# Altium PCB PCB1.PcbDoc
Units mm, origin at the board's own origin, x right, y up, seen from the top; angles counter-clockwise.
Board outline 71.12 x 64.77 mm, 2 copper layers (Top Layer, Bottom Layer); 12 components, 9 nets, 96 pads, 0 vias.
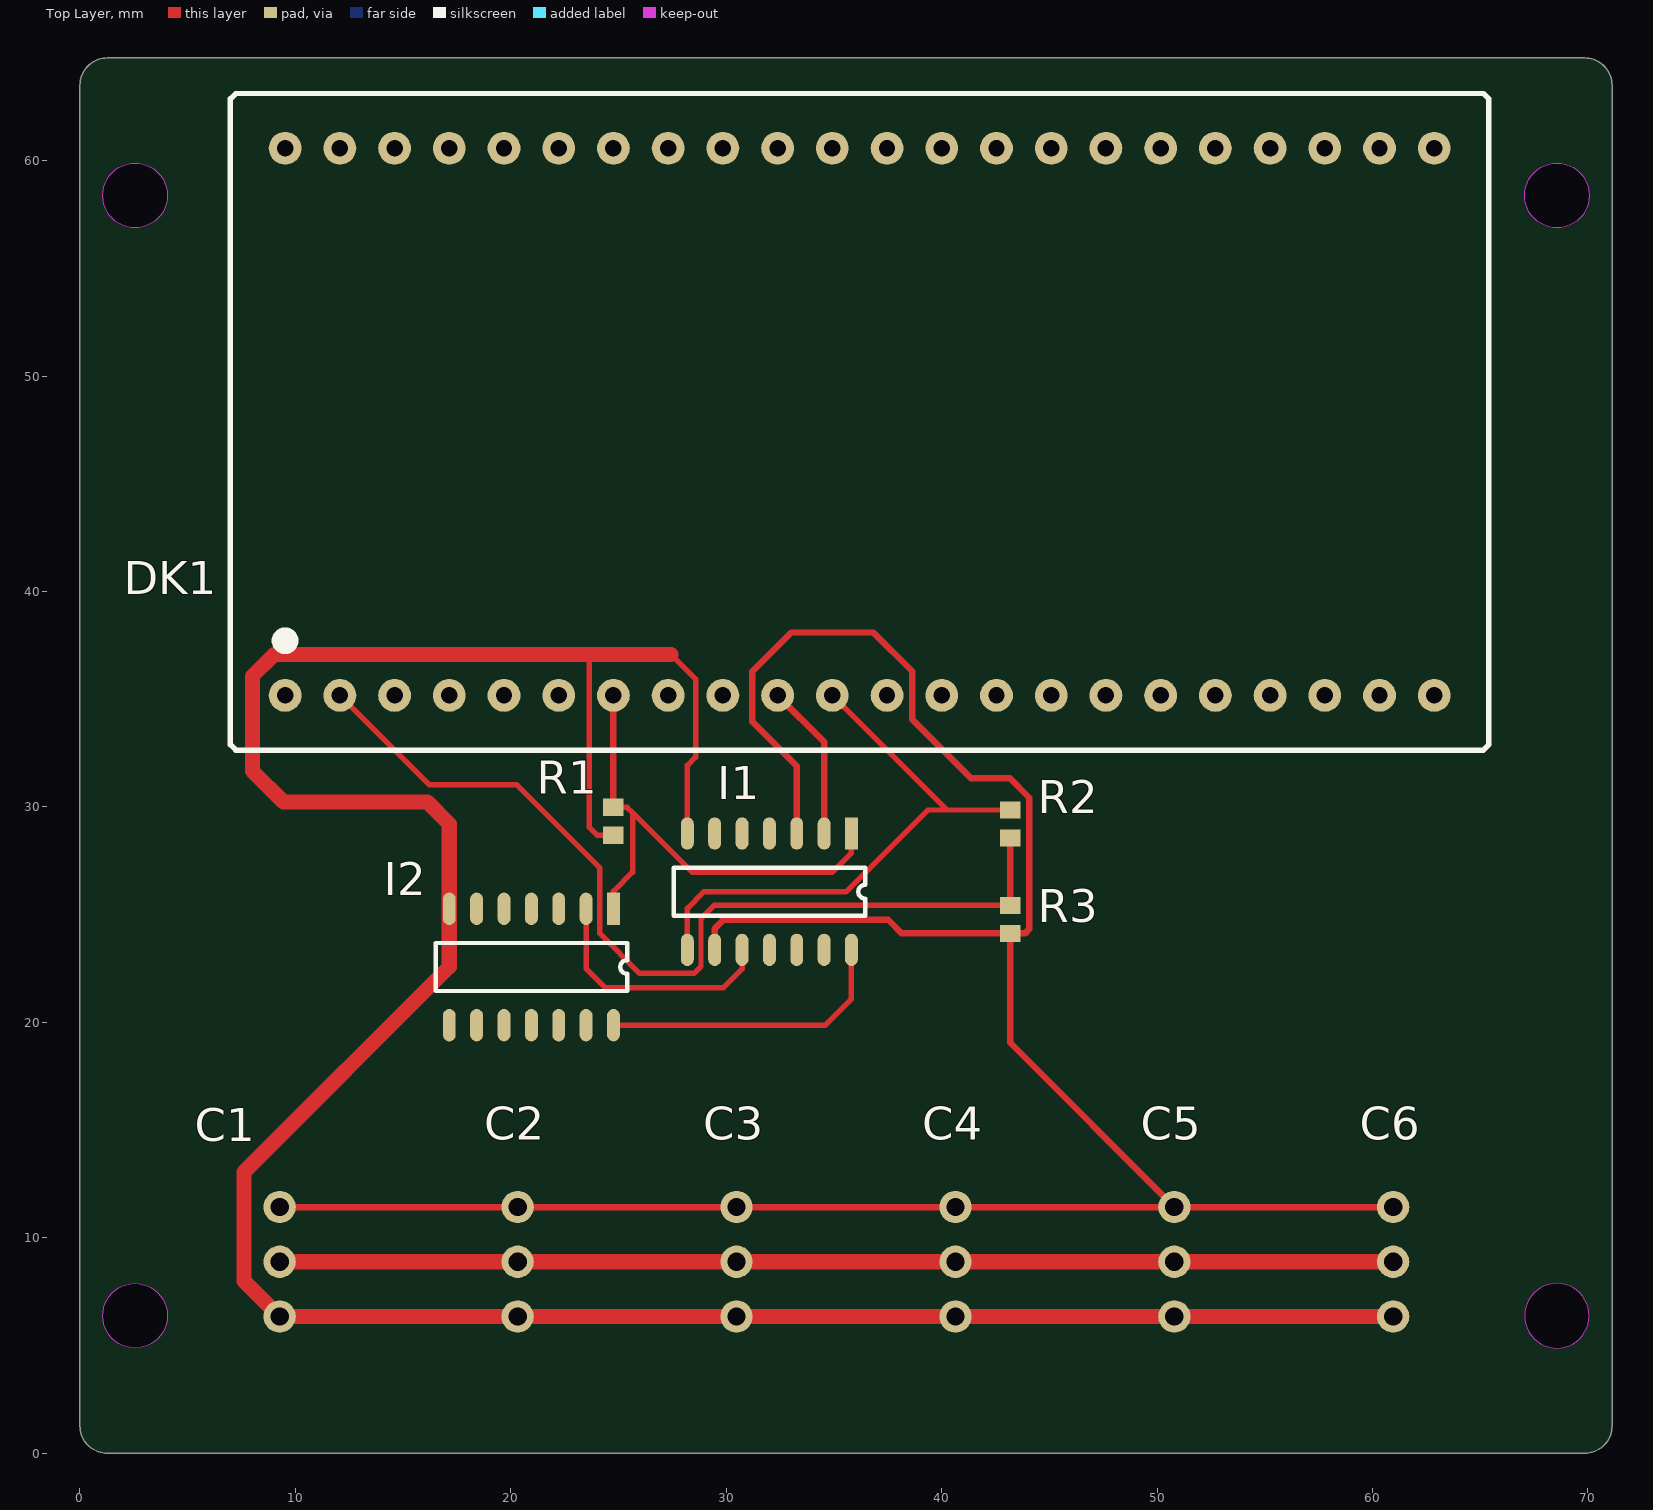
[diagram p0: Top Layer view]
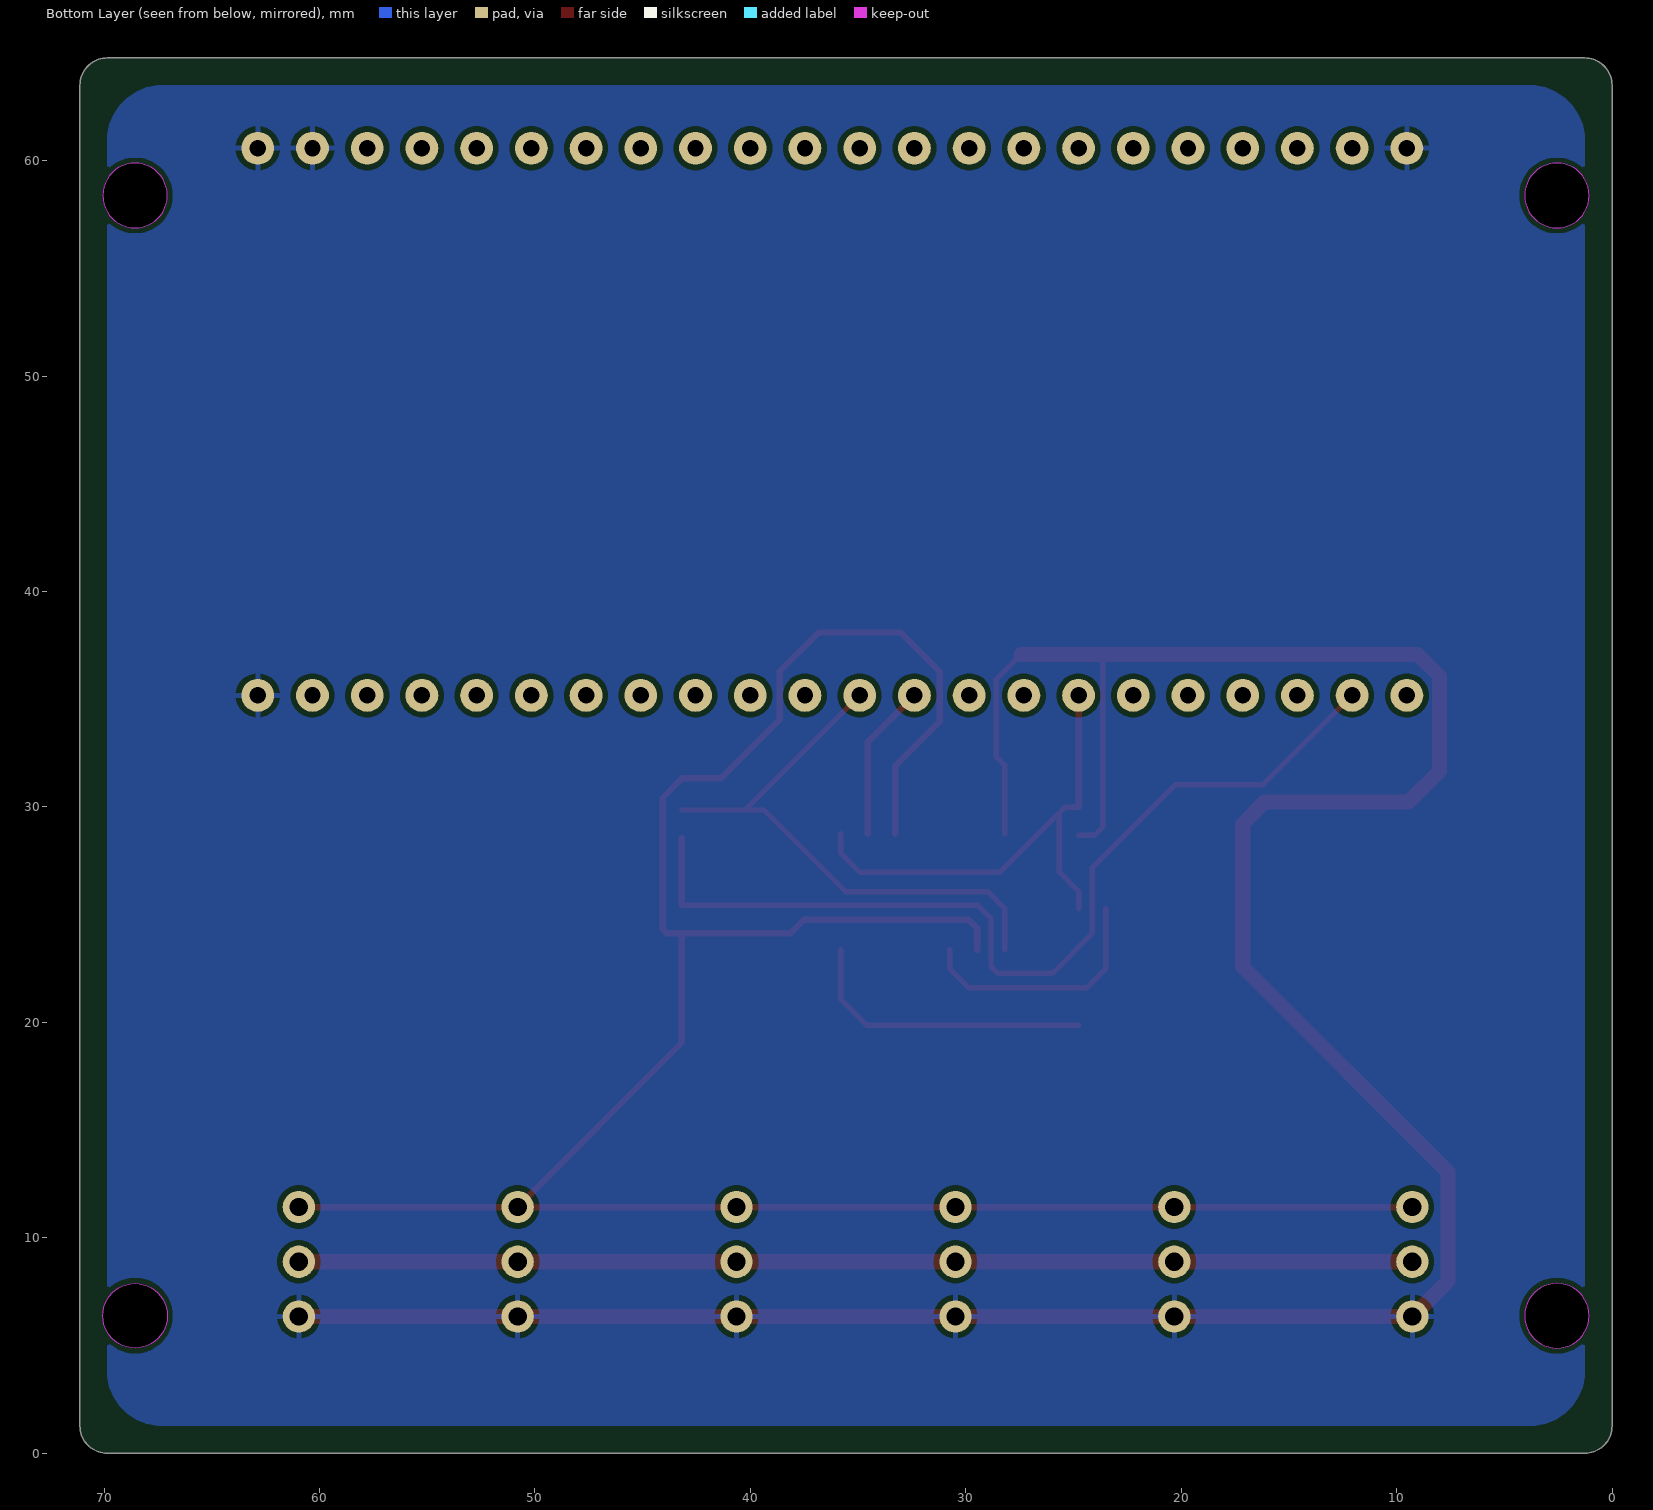
[diagram p1: Bottom Layer view, seen from below]
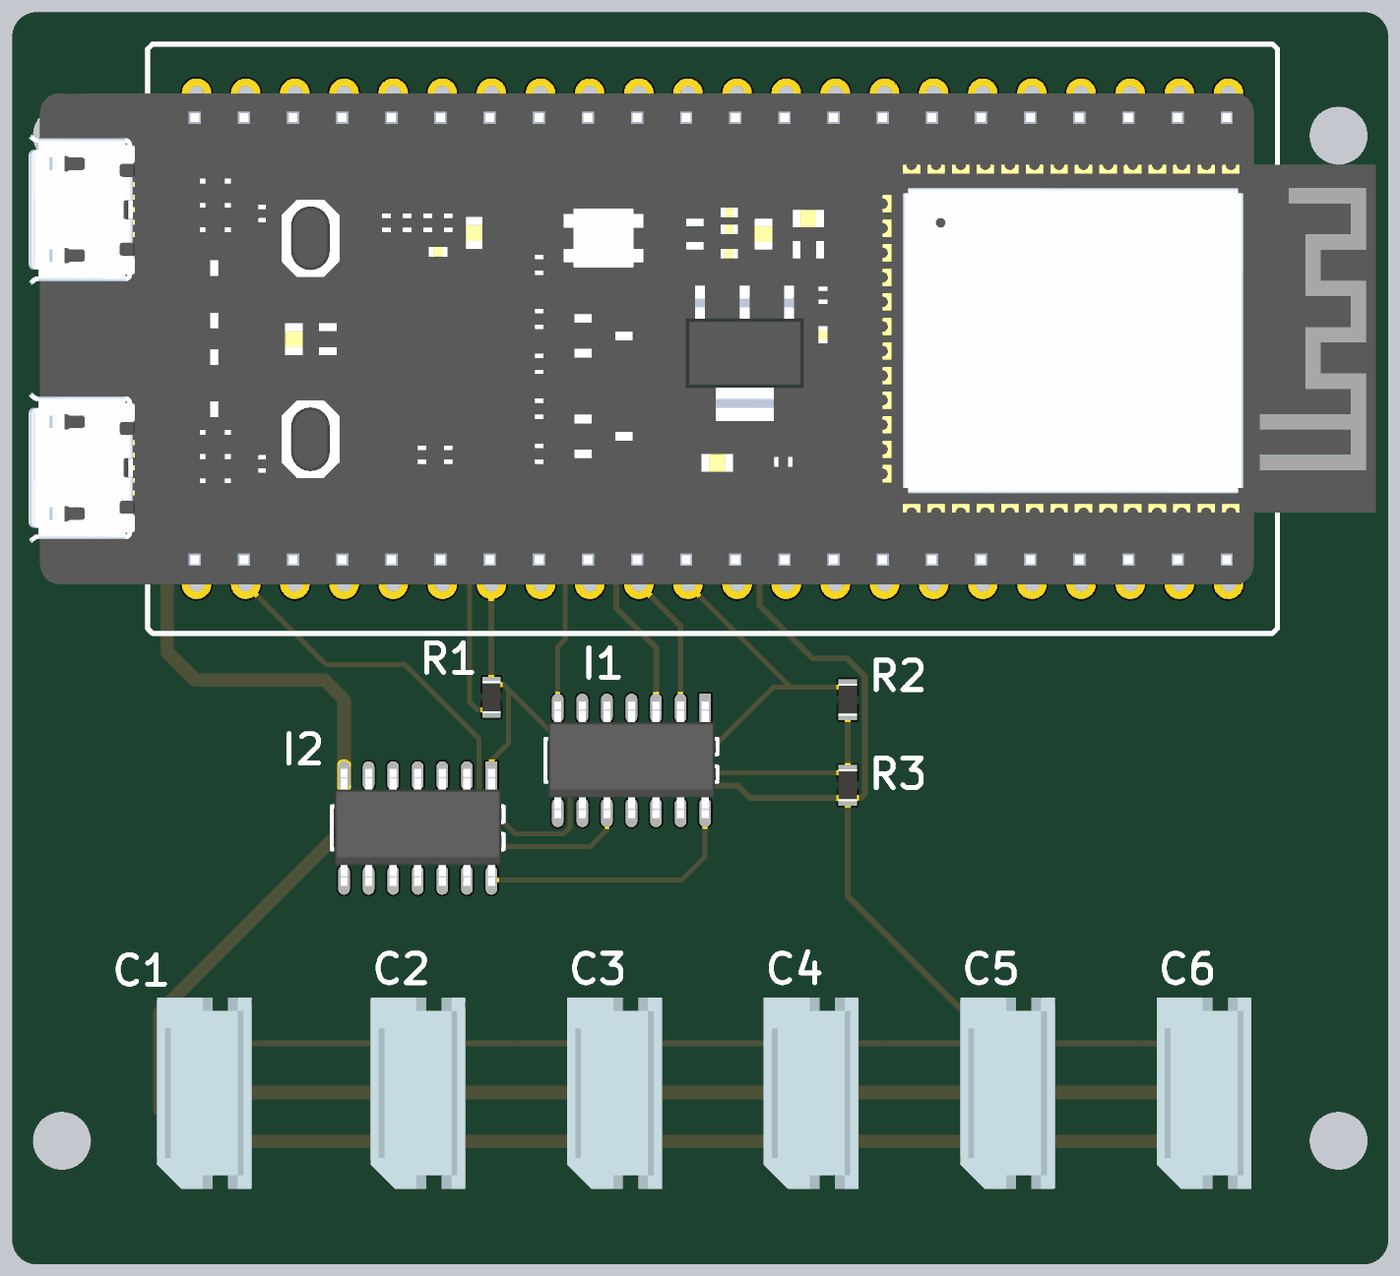
[diagram p2: 3D render of the assembled board from above, using the file's embedded part models]

## Layer stack, top to bottom
Top Solder: solder mask 0.0102, Solder Resist, Dk 3.5
Top Layer: signal copper 0.0356
Dielectric 1: dielectric 0.32, FR-4, Dk 4.8
Bottom Layer: signal copper 0.0356
Bottom Solder: solder mask 0.0102, Solder Resist, Dk 3.5

## Board outline
0,1.27 0,63.5 cw(c1.27,63.5) 1.27,64.77 69.85,64.77 cw(c69.85,63.5) 71.12,63.5 71.12,1.27 cw(c69.85,1.27) 69.85,0 1.27,0 cw(c1.27,1.27)
cut-out: 2.56,4.885 cw(c2.56,6.385) 1.06,6.385 cw(c2.56,6.385) 2.56,7.885 cw(c2.56,6.385) 4.06,6.385 cw(c2.56,6.385)
cut-out: 67.06,6.385 ccw(c68.56,6.385) 68.56,4.885 ccw(c68.56,6.385) 70.06,6.385 ccw(c68.56,6.385) 68.56,7.885 ccw(c68.56,6.385)
cut-out: 68.56,56.885 cw(c68.56,58.385) 67.06,58.385 cw(c68.56,58.385) 68.56,59.885 cw(c68.56,58.385) 70.06,58.385 cw(c68.56,58.385)
cut-out: 2.56,56.885 cw(c2.56,58.385) 1.06,58.385 cw(c2.56,58.385) 2.56,59.885 cw(c2.56,58.385) 4.06,58.385 cw(c2.56,58.385)

## Design rules (kind name [scope] priority, off if disabled: settings)
BoardOutlineClearance BoardOutlineClearance_2 [All] p1: gap=0.254 ignorepadtopadclearanceinfootprint=FALSE except(0: Arc-SplitContinuation Track-SplitContinuation SMDPad-SplitContinuation THPad-SplitContinuation Via-SplitContinuation Fill-SplitContinuation Poly-SplitContinuation Region-SplitContinuation Text-SplitContinuation)
BoardOutlineClearance BoardOutlineClearance_1 [All] p2: gap=0.254 ignorepadtopadclearanceinfootprint=FALSE except(0: Arc-SplitContinuation Track-SplitContinuation SMDPad-SplitContinuation THPad-SplitContinuation Via-SplitContinuation Fill-SplitContinuation Poly-SplitContinuation Region-SplitContinuation Text-SplitContinuation)
Clearance Clearance_1 [OnMid vs OnMid] p1: gap=0.25 ignorepadtopadclearanceinfootprint=FALSE except(0.2: Arc-Arc Arc-Track Arc-SMDPad Arc-THPad Arc-Text Track-Track Track-SMDPad Track-THPad Track-Text SMDPad-SMDPad SMDPad-THPad SMDPad-Via SMDPad-Text THPad-THPad THPad-Via THPad-Text Via-Via Text-Text Hole-Hole; 0.254: Arc-Via Track-Via Via-Text; 0.5: Arc-Hole Track-Hole SMDPad-Hole THPad-Hole Via-Hole Fill-Hole Poly-Hole Region-Hole Text-Hole) sourcerule=39 cellrowname=All cellrowtype=0 cellcolname=All cellcoltype=0 innerlayers=TRUE
Clearance Clearance_2 [(ExistsOnLayer('Top Layer') Or ExistsOnLayer('Bottom Layer')) vs (ExistsOnLayer('Top Layer') Or ExistsOnLayer('Bottom Layer'))] p2: gap=0.25 ignorepadtopadclearanceinfootprint=FALSE except(0.2: Arc-Arc Arc-Track Arc-SMDPad Arc-THPad Arc-Text Track-Track Track-SMDPad Track-THPad Track-Text SMDPad-SMDPad SMDPad-THPad SMDPad-Via SMDPad-Text THPad-THPad THPad-Via THPad-Text Via-Via Text-Text Hole-Hole; 0.254: Arc-Via Track-Via Via-Text; 0.5: Arc-Hole Track-Hole SMDPad-Hole THPad-Hole Via-Hole Fill-Hole Poly-Hole Region-Hole Text-Hole) sourcerule=39 cellrowname=All cellrowtype=0 cellcolname=All cellcoltype=0 outerlayers=TRUE
Clearance [All] p3: gap=0.254 ignorepadtopadclearanceinfootprint=FALSE ismatrix=TRUE
PlaneConnect [All] p1: planeconnectstyle=Direct reliefexpansion=0.508 reliefentries=4 reliefconductorwidth=0.254 reliefairgap=0.254
PolygonConnect [All] p1: connectstyle=Relief reliefconductorwidth=0.254 reliefentries=4 polygonreliefangle="90 Angle" airgapwidth=0.254
RoutingVias [All] p1: holewidth=0.711 width=1.27 viastyle="Through Hole" minholewidth=0.711 minwidth=1.27 maxholewidth=0.711 maxwidth=1.27
SolderMaskExpansion [All] p1: expansion=0.102 istentingtop=FALSE
UnRoutedNet UnRoutedNet_1 [InNet('GND')] p1: checkbadconnections=TRUE
UnRoutedNet [All] p2:
Width [All] p1: maxlimit=1 minlimit=0.102 preferedwidth=0.3
28 further rules are at their usual default settings.

## Classes and differential pairs
component class Sheet: C1 DK1 I2 R1

## Components (designator, comment, footprint, x,y, rotation, side; value= is the part's Value field where it differs from the comment)
C1 "MOLEX 22-03-5035" PCBComponent_1 9.271,6.35 r90 top (schematic designator C?)
C2 "MOLEX 22-03-5035" PCBComponent_1 20.32,6.35 r90 top (schematic designator C?)
C3 "MOLEX 22-03-5035" PCBComponent_1 30.48,6.35 r90 top (schematic designator C?)
C4 "MOLEX 22-03-5035" PCBComponent_1 40.64,6.35 r90 top (schematic designator C?)
C5 "MOLEX 22-03-5035" PCBComponent_1 50.8,6.35 r90 top (schematic designator C?)
C6 "MOLEX 22-03-5035" PCBComponent_1 60.96,6.35 r90 top (schematic designator C?)
DK1 "ESP32-S3" "ESP32-S3-DevKit footprint" 34.925,47.879 r90 top (schematic designator DK?)
I1 "74LVC125A" SOP14 35.814,28.768 r270 top (schematic designator I?)
I2 "74LVC14AD" SOP14 24.765,25.273 r270 top (schematic designator I?)
R1 "10k" RESC1609X50X30NL8T20 24.765,29.337 r270 top (schematic designator R?)
R2 "10k" RESC1609X50X30NL8T20 43.18,29.21 r270 top (schematic designator R?)
R3 "10k" RESC1609X50X30NL8T20 43.18,24.78 r270 top (schematic designator R?)

## Footprints (in the part's own frame and the unit in brackets; to place one, negate y for a bottom-side part, rotate by r counter-clockwise, add the part's x,y. Pads: shape width x height; smd on the part's side, far side on the other; paste and mask are expansions set on the pad)
"ESP32-S3-DevKit footprint" [mil]
  round 60 hole 30: 1(-500,1000) 2(-500,900) 3(-500,800) 4(-500,700) 5(-500,600) 6(-500,500) 7(-500,400) 8(-500,300) 9(-500,200) 10(-500,100) 11(-500,0) 12(-500,-100) 13(-500,-200) 14(-500,-300) 15(-500,-400) 16(-500,-500) 17(-500,-600) 18(-500,-700) 19(-500,-800) 20(-500,-900) 21(-500,-1000) 22(-500,-1100) 23(500,-1100) 24(500,-1000) 25(500,-900) 26(500,-800) 27(500,-700) 28(500,-600) 29(500,-500) 30(500,-400) 31(500,-300) 32(500,-200) 33(500,-100) 34(500,0) 35(500,100) 36(500,200) 37(500,300) 38(500,400) 39(500,500) 40(500,600) 41(500,700) 42(500,800) 43(500,900) 44(500,1000)
  silkscreen extent -600,-1200 600,1100, body extent -500,-1400 500,1342, height 361
PCBComponent_1 [mm]
  round 1.5 hole 0.85: 1(0,0) 2(2.54,0) 3(5.08,0)
  body extent -2.45,-3.1 7.45,1.8, height 5.8
RESC1609X50X30NL8T20 [mm] "Chip Resistor, 2-Leads, Body 1.65x0.95mm, IPC Medium Density"
  rect 0.8x0.95 smd: 1(-0.65,0) 2(0.65,0)
  body extent -0.82,-0.48 0.82,0.48, height 0.5
SOP14 [mm]
  rect 1.5x0.6 smd: 1(0,0)
  oval 1.5x0.6 smd: 2(0,-1.27) 3(0,-2.54) 4(0,-3.81) 5(0,-5.08) 6(0,-6.35) 7(0,-7.62) 8(5.4,0) 9(5.4,-1.27) 10(5.4,-2.54) 11(5.4,-3.81) 12(5.4,-5.08) 13(5.4,-6.35) 14(5.4,-7.62)
  silkscreen extent 1.59,-8.25 3.81,0.64, body extent -0.36,-8.13 5.69,0.51, height 1.64

## Part data
DK1: library part "ESP32-S3-N16R2 DevKit"
R1 R2 R3: library part CMP-1666-00005-4, "Chip Resistor, 10 KOhm, +/- 1%, 100 mW, -55 to 155 degC, 0603 (1608 Metric), RoHS, Tape and Reel", Manufacturer="Vishay Semiconductor", Max Operating Temperature="155 degC", Min Operating Temperature="-55 degC", Package Quantity=5000, Voltage Rating="75 V", ComponentLink1Description="Manufacturer URL", ComponentLink1URL=http://www.vishay.com/, ComponentLink2Description=Datasheet, ComponentLink2URL=https://datasheet.ciiva.com/11809/0900766b80d98afc-11809037.pdf, DatasheetVersion=06/2012, Height="0.45 mm", Length="1.55 mm", Mounting Technology="Surface Mount", PackageDescription="2-Pin Surface Mount Device, Body 1.575 x 0.85 mm", PackageReference=0603, Packaging="Tape and Reel", REACH SVHC=Unknown, RoHSCompliant=true

## Nets (pads, with @x,y where several pads share a name; then routed paths per layer and width w, separated by ;. In a path a pad name is that pad's centre, name@x,y a point inside that pad or via, vN(x,y) a via of type N, cw(c..) or ccw(c..) an arc to the next point about the centre after c; other vN are vias at no path point)
3V3: I1.8 I2.8 | length 13.8
  Top Layer w0.254: I2.8 34.605,19.873 35.814,21.082 I1.8
+3V3: DK1.2 R2.2 R3.1 | length 44
  Top Layer w0.254: DK1.2 16.217,31.027 20.281,31.027 24.13,27.178 24.13,24.13 25.984,22.276 28.499,22.276 28.829,22.606 28.829,24.816 29.443,25.43 R3.1
  Top Layer w0.3: R3.1 R2.2
+12: C1.2 C2.2 C3.2 C4.2 C5.2 C6.2 | length 51.7
  Top Layer w0.7: C1.2 C2.2 C3.2 C4.2 C5.2 C6.2
GND: C1.1 C2.1 C3.1 C4.1 C5.1 C6.1 DK1.22 DK1.23 DK1.24 DK1.44 I1.7 I2.7 R1.2 | length 131.8
  Top Layer w0.254: 23.647,37.084 23.647,29.058 24.018,28.687 R1.2 ; 27.432,37.084 28.575,35.941 28.575,32.309 28.194,31.928 I1.7
  Top Layer w0.7: 27.432,37.084 23.647,37.084 9.017,37.084 8.001,36.068 8.001,31.674 9.449,30.226 16.129,30.226 17.145,29.21 I2.7 17.145,22.581 7.62,13.056 7.62,8.001 C1.1 C2.1 C3.1 C4.1 C5.1 C6.1
RX: DK1.11 I1.14 R2.1 | length 26.3
  Top Layer w0.254: I1.14 28.194,25.298 28.956,26.06 35.56,26.06 39.36,29.86 40.244,29.86 ; DK1.11 40.244,29.86 ; R2.1 40.244,29.86
RXEN: I1.12 I2.2 | length 11.6
  Top Layer w0.254: I2.2 23.495,22.504 24.384,21.615 29.87,21.615 30.734,22.479 I1.12
SERVO_DATA: C1.3 C2.3 C3.3 C4.3 C5.3 C6.3 I1.3 I1.13 R3.2 | length 116.2
  Top Layer w0.3: C1.3 C2.3 C3.3 C4.3 C5.3 ; I1.13 29.464,24.359 29.87,24.765 37.516,24.765 38.151,24.13 R3.2 ; I1.3 33.274,31.902 31.217,33.96 31.217,36.297 33.02,38.1 36.83,38.1 38.633,36.297 38.633,34.061 41.351,31.344 43.155,31.344 44.069,30.429 44.069,24.333 43.866,24.13 R3.2 ; C6.3 C5.3 ; R3.2 43.18,19.05 C5.3
TX: DK1.10 I1.2 | length 7.3
  Top Layer w0.3: DK1.10 34.544,33.02 I1.2
TXEN: DK1.7 I1.1 I2.1 R1.1 | length 23.6
  Top Layer w0.254: I2.1 24.765,26.086 25.654,26.975 25.654,29.733 ; R1.1 25.4,29.987 25.654,29.733 ; I1.1 35.814,27.864 34.925,26.975 28.412,26.975 25.654,29.733
  Top Layer w0.3: R1.1 DK1.7
pads on no net: DK1.1 DK1.3 DK1.4 DK1.5 DK1.6 DK1.8 DK1.9 DK1.12 DK1.13 DK1.14 DK1.15 DK1.16 DK1.17 DK1.18 DK1.19 DK1.20 DK1.21 DK1.25 DK1.26 DK1.27 DK1.28 DK1.29 DK1.30 DK1.31 DK1.32 DK1.33 DK1.34 DK1.35 DK1.36 DK1.37 DK1.38 DK1.39 DK1.40 DK1.41 DK1.42 DK1.43 I1.4 I1.5 I1.6 I1.9 I1.10 I1.11 I2.3 I2.4 I2.5 I2.6 I2.9 I2.10 I2.11 I2.12 I2.13 I2.14

## Polygon pours and split planes (outlines as drawn)
GND on Bottom Layer "GND_L02_P001" (solid, pour order 1): 1.27,60.96 cw(c3.81,60.96) 3.81,63.5 67.31,63.5 cw(c67.31,60.96) 69.85,60.96 69.85,3.81 cw(c67.31,3.81) 67.31,1.27 3.81,1.27 cw(c3.81,3.81) 1.27,3.81 1.27,6.35

## Silkscreen, mask and mechanical layers (free items; w line width, h text height)
Mechanical 1:
  circle w0.381: c68.56,58.385 r1.5
  circle w0.381: c68.56,6.385 r1.5
  circle w0.381: c2.56,6.385 r1.5
  circle w0.381: c2.56,58.385 r1.5
  lines w0.254: 0,1.27 ccw(c1.27,1.27) 1.27,0 69.85,0 ccw(c69.85,1.27) 71.12,1.27 71.12,63.5 ccw(c69.85,63.5) 69.85,64.77 8.89,64.77 1.27,64.77 ccw(c1.27,63.5) 0,63.5 0,1.27